# Altium PCB 集成运算放大器的应用.PcbDoc
Units mil, origin at the board's own origin, x right, y up, seen from the top; angles counter-clockwise.
Board outline 2220 x 1720 mil, 2 copper layers (Top Layer, Bottom Layer); 38 components, 25 nets, 93 pads, 102 vias.
Unrouted connection lines stored in the file: 4.
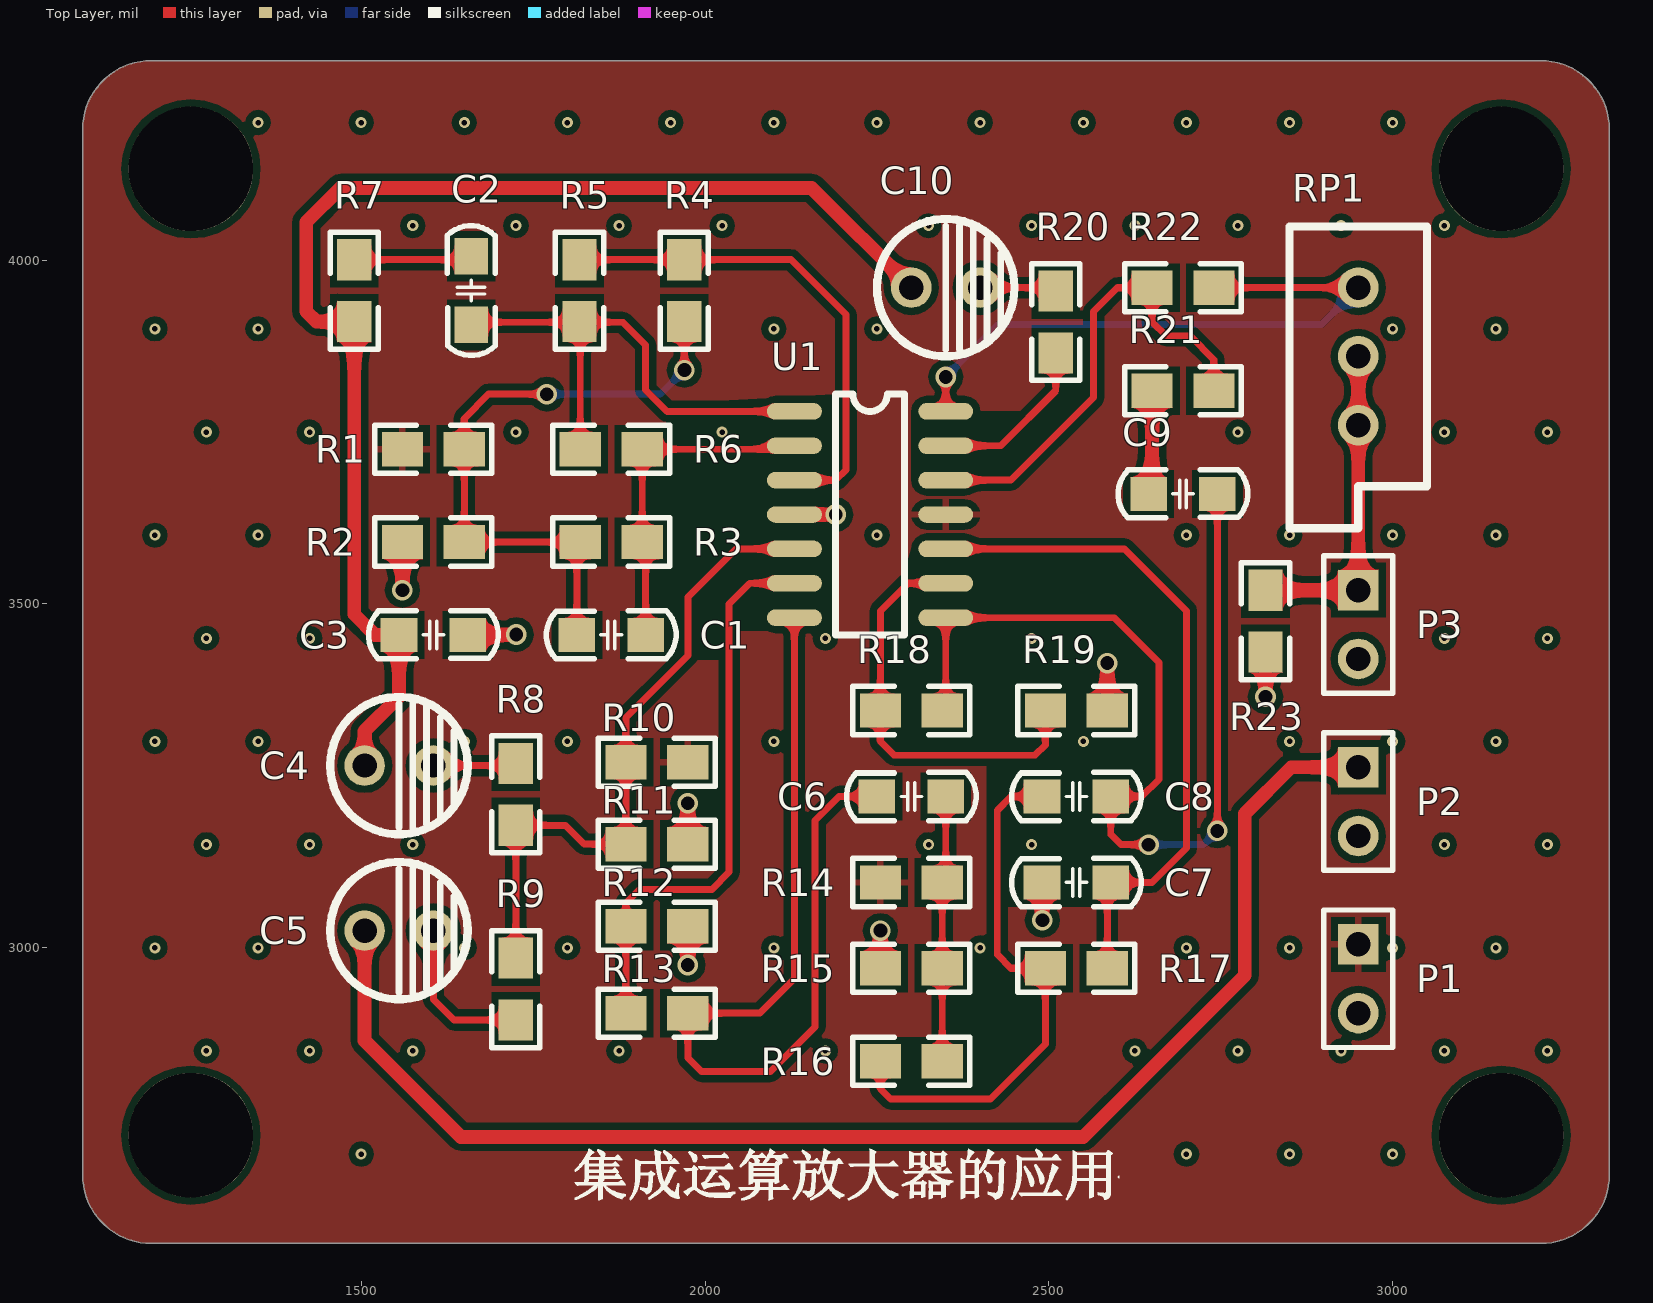
[diagram p0: Top Layer view]
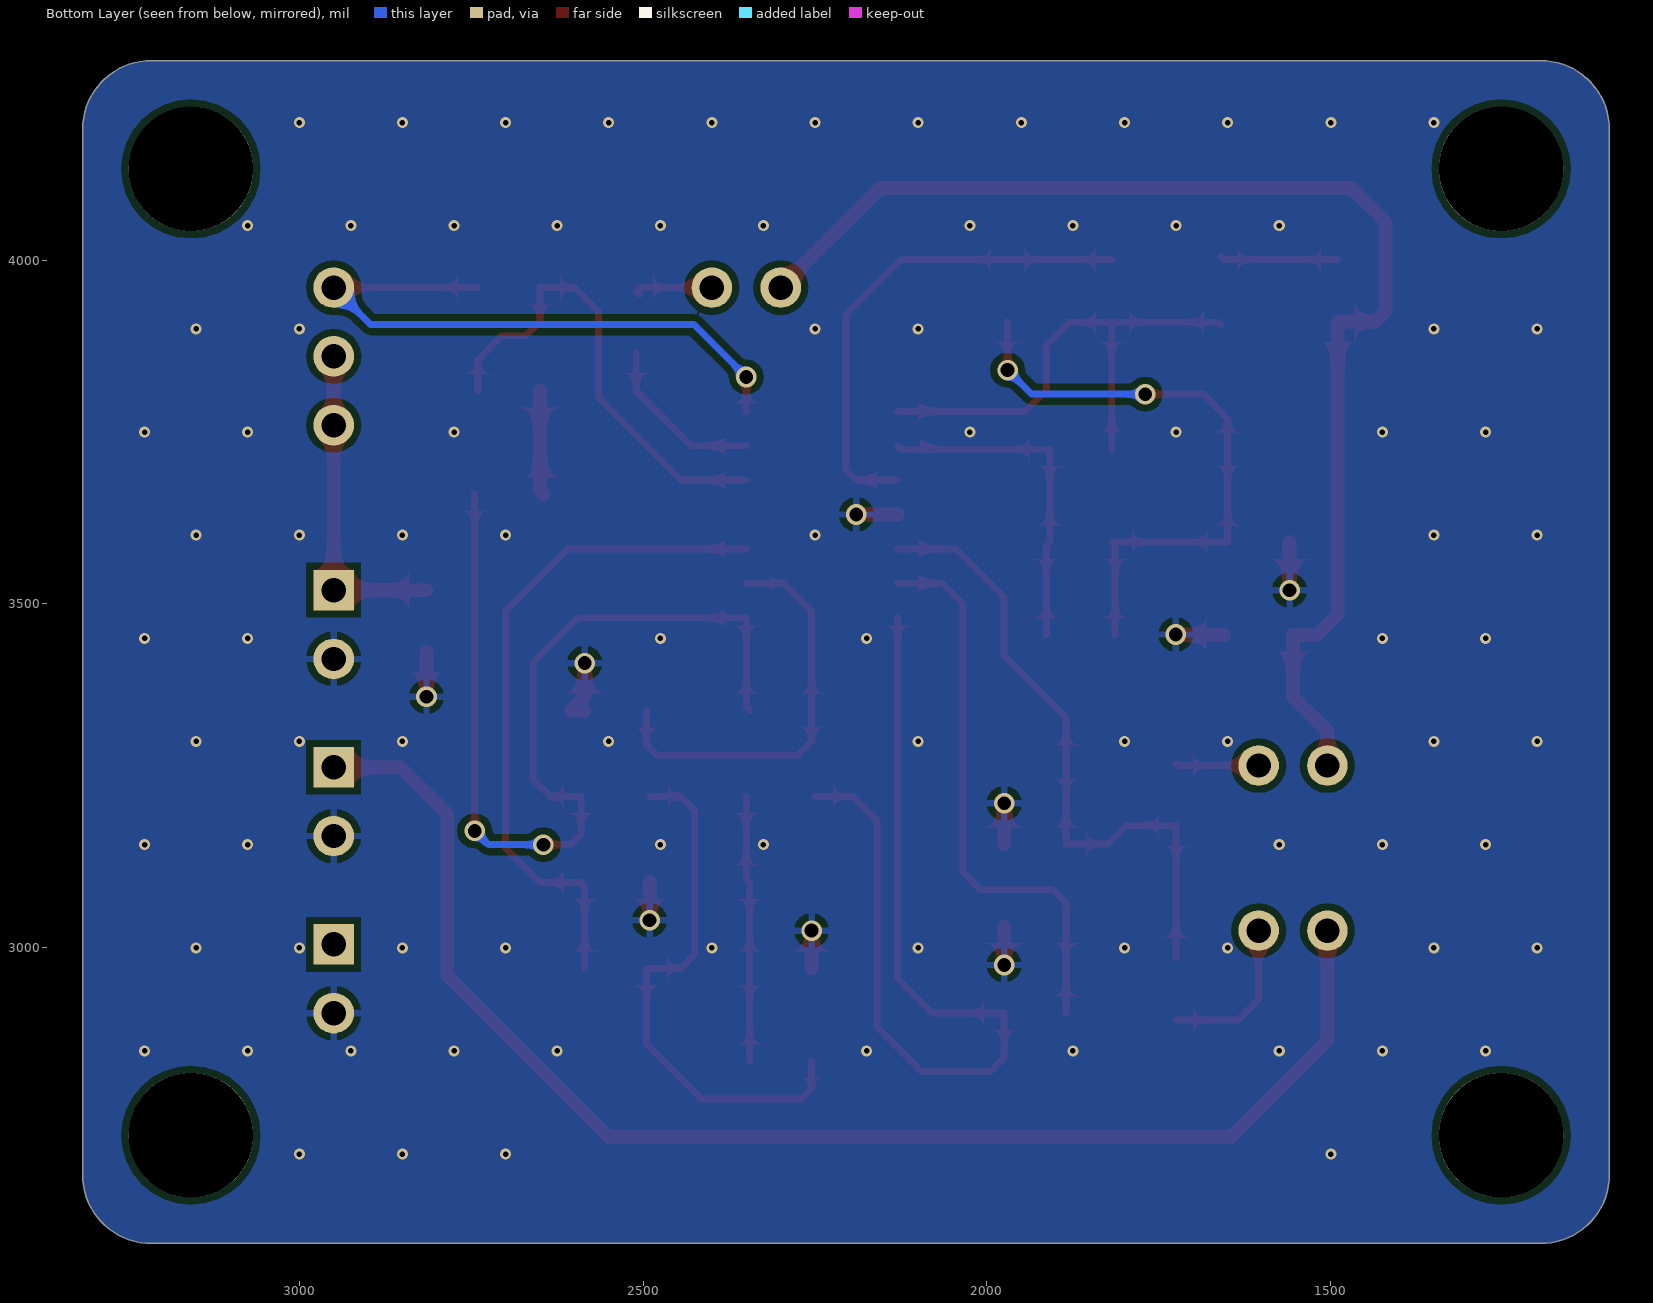
[diagram p1: Bottom Layer view, seen from below]
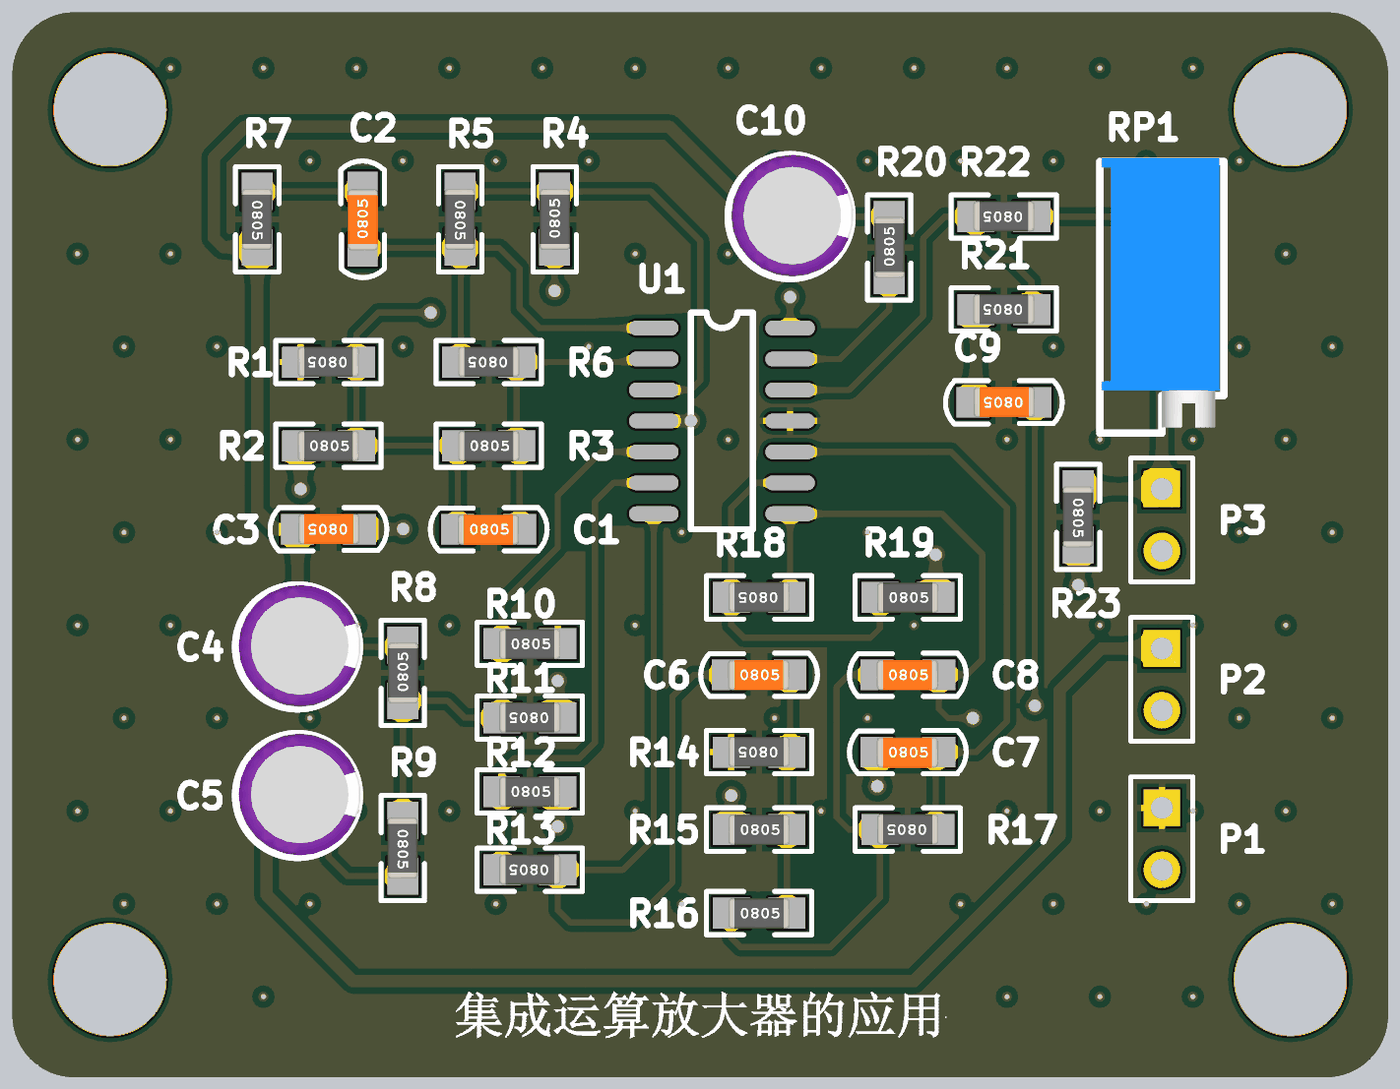
[diagram p2: 3D render of the assembled board from above, using the file's embedded part models]

## Layer stack, top to bottom
Top Solder: solder mask 0.4, Solder Resist, Dk 3.5
Top Layer: signal copper 1.4
Dielectric 1: dielectric 12.6, FR-4, Dk 4.8
Bottom Layer: signal copper 1.4
Bottom Solder: solder mask 0.4, Solder Resist, Dk 3.5

## Board outline
3215,4290 cw(c3215,4190) 3315,4190 3315,2670 cw(c3215,2670) 3215,2570 1195,2570 cw(c1195,2670) 1095,2670 1095,4190 cw(c1195,4190) 1195,4290

## Design rules (kind name [scope] priority, off if disabled: settings)
Clearance [All] p1: gap=10 ignorepadtopadclearanceinfootprint=FALSE except(0: Arc-Hole Track-Hole SMDPad-Hole THPad-Hole Via-Hole Fill-Hole Poly-Hole Region-Hole Text-Hole; 8: THPad-Via)
PolygonConnect [All] p1: connectstyle=Relief reliefconductorwidth=10 reliefentries=4 polygonreliefangle="90 Angle" airgapwidth=10
RoutingVias [All] p1: holewidth=12 width=24 viastyle="Through Hole" minholewidth=8 minwidth=16 maxholewidth=20 maxwidth=30
SolderMaskExpansion [All] p1: expansion=4
Width [InNetClass('Signal')] p1: maxlimit=10 minlimit=10 preferedwidth=10
Width Signal [InNetClass('Signal')] p2: maxlimit=10 minlimit=10 preferedwidth=10
Width PWR [InNetClass('PWR')] p3: maxlimit=20 minlimit=20 preferedwidth=20
30 further rules are at their usual default settings.

## Classes and differential pairs
net class Signal: NetC1_1 NetC1_2 NetC2_1 NetC2_2 NetC4_2 NetC5_2 NetC6_1 NetC6_2 NetC7_2 NetC8_1 NetC8_2 NetC10_2 NetR4_2 NetR8_1 NetR12_1 NetR18_2 NetR20_1 NetR21_1 NetR22_1
net class PWR: GND Ui1 Uo1 Uo2 Uo3 VCC

## Components (designator, comment, footprint, x,y, rotation, side; value= is the part's Value field where it differs from the comment)
C1 "160nF" 0805C 1813.65,3460 r0 top
C2 "100μF" 0805C 1655,3905.68 r90 top
C3 "100μF" 0805C 1655,3450 r180 top
C4 "10μF" CAP.1/.2 1555,3260 r0 top
C5 "10μF" CAP.1/.2 1555,3020 r0 top
C6 "100μF" 0805C 2250,3225 r0 top
C7 "0.1μF" 0805C 2490,3100 r0 top
C8 "0.1μF" 0805C 2490,3225 r0 top
C9 "100μF" 0805C 2745,3655 r180 top
C10 "100μF" CAP.1/.2 2350,3955 r0 top
P1 "POWER" HDR1X2 2950,3005 r270 top
P2 "Vin" HDR1X2 2950,3262.5 r270 top
P3 "Vin" HDR1X2 2950,3520 r270 top
R1 "10k" 0805R 1650,3725 r180 top
R2 "10k" 0805R 1560,3590 r0 top
R3 "100k" 0805R 1818.65,3590 r0 top
R4 "1.69k" 0805R 1970,3910.68 r90 top
R5 "2k" 0805R 1817.5,4000.68 r270 top
R6 "1k" 0805R 1908.65,3725 r180 top
R7 "3k" 0805R 1490,4000.68 r270 top
R8 "10k" 0805R 1725,3178 r90 top
R9 "1k" 0805R 1725,2985 r270 top
R10 "400k" 0805R 1885,3270 r0 top
R11 "25k" 0805R 1975,3150.67 r180 top
R12 "1k" 0805R 1885,3031.33 r0 top
R13 "10k" 0805R 1975,2905 r180 top
R14 "100k" 0805R 2345,3095 r180 top
R15 "20k" 0805R 2255,2970 r0 top
R16 "4.3k" 0805R 2255,2835 r0 top
R17 "4.3k" 0805R 2585,2970 r180 top
R18 "4.3k" 0805R 2345,3345 r180 top
R19 "1k" 0805R 2495,3345 r0 top
R20 "1k" 0805R 2510,3865 r90 top
R21 "1k" 0805R 2740,3810 r180 top
R22 "100k" 0805R 2740,3960 r180 top
R23 "1k" 0805R 2815,3520 r270 top
RP1 "10k" 3296 2950,3860 r270 top
U1 "LM324" SO-14 2130,3780 r0 top

## Footprints (in the part's own frame and the unit in brackets; to place one, negate y for a bottom-side part, rotate by r counter-clockwise, add the part's x,y. Pads: shape width x height; smd on the part's side, far side on the other; paste and mask are expansions set on the pad)
0805C [mm]
  rect 1.35x1.25 smd: 1(0,-0.127) 2(2.54,-0.127)
  silkscreen extent -1.12,-1.02 3.66,0.76, body extent 0,-0.76 2.51,0.48, height 0.79
0805R [mil]
  rect 60x50 smd: 1(0,0) 2(90,0)
  silkscreen extent -40,-35 130,35, body extent -4,-25 94,24, height 31
3296 [mm]
  round 1.5 hole 0.9: 1(-2.54,0) 2(2.54,0) 3(0,0)
  silkscreen extent -4.8,-2.54 6.35,2.54, body extent -4.93,-2.46 6.12,2.37, height 10.03
CAP.1/.2 [mm]
  round 1.5 hole 0.9: 1(-1.27,0.127) 2(1.27,0.127)
  silkscreen extent -2.54,-2.41 2.54,2.66, body extent -2.41,-2.33 2.59,2.67, height 11
HDR1X2 [mm] "Connector; Header; 2 Position"
  rect 1.5x1.5 hole 0.9: 1(0,0)
  round 1.5 hole 0.9: 2(2.54,0)
  silkscreen extent -1.27,-1.27 3.81,1.27
SO-14 [mil]
  oval 80x24 smd: 1(0,0) 2(0,-50) 3(0,-100) 4(0,-150) 5(0,-200) 6(0,-250) 7(0,-300) 8(220,-300) 9(220,-250) 10(220,-200) 11(220,-150) 12(220,-100) 13(220,-50) 14(220,0)
  silkscreen extent 60,-325 160,25

## Part data
C1 C2 C3 C6 C7 C8 C9: library part CAP, "Capacitor"
C4 C5 C10: library part CAP+, "Capacitor"
P1 P2 P3: library part "Header 2", "Header, 2-Pin", LatestRevisionDate=17-Jul-2002, LatestRevisionNote="Re-released for DXP Platform.", Publisher="Altium Limited"
R1 R2 R3 R4 R5 R6 R7 R8 R9 R10 R11 R12 R13 R14 R15 R16 R17 R18 R19 R20 R21 R22 R23: library part Res, "Resistor"
RP1: library part RPOT1, "Resistor"

## Free pads (board coordinates)
  round 181.1 hole 181.1: 2(1252.48,2727.48) 2(1252.48,4132.52) 2(3157.52,2727.48) 2(3157.52,4132.52)

## Via types
v1: diameter 16, hole 8, Top Layer to Bottom Layer, tented both sides, 88 vias
v2: diameter 30, hole 20, Top Layer to Bottom Layer, tented both sides, 14 vias

## Nets (pads, with @x,y where several pads share a name; then routed paths per layer and width w, separated by ;. In a path a pad name is that pad's centre, name@x,y a point inside that pad or via, vN(x,y) a via of type N, cw(c..) or ccw(c..) an arc to the next point about the centre after c; other vN are vias at no path point)
GND: C3.1 C7.1 P1.2 P2.2 P3.2 R2.1 R11.1 R12.2 R15.1 R19.2 R23.2 U1.4 | length 588.9
  Top Layer w20: v2(1560,3520) R2.1 ; C3.1 1725,3455 v2(1725.5,3455.5) ; v2(1975,2975) R12.2 ; R11.1 v2(1975,3210) ; U1.4 v2(2190,3630) ; R15.1 v2(2255,3025) ; C7.1 2490,3040.62 v2(2490.62,3040) ; R19.2 2605,3345 2585,3365 v2(2585,3414) ; v2(2815,3365) R23.2
  other v1: 1500,2700 2700,2700 2850,2700 3000,2700 1275,2850 1425,2850 1575,2850 1875,2850 2175,2850 2625,2850 2775,2850 2925,2850 3075,2850 3225,2850 1200,3000 1350,3000 1650,3000 1800,3000 2100,3000 2400,3000 2700,3000 2850,3000 3000,3000 3150,3000 1275,3150 1425,3150 1575,3150 2325,3150 2475,3150 3075,3150 3225,3150 1200,3300 1350,3300 1650,3300 1800,3300 2100,3300 2550,3300 2850,3300 3000,3300 3150,3300 1275,3450 1425,3450 2175,3450 2475,3450 3075,3450 3225,3450 1200,3600 1350,3600 2250,3600 2700,3600 2850,3600 3000,3600 3150,3600 1275,3750 1425,3750 1725,3750 2025,3750 2775,3750 3075,3750 3225,3750 1200,3900 1350,3900 2100,3900 2250,3900 3000,3900 3150,3900 1575,4050 1725,4050 1875,4050 2025,4050 2325,4050 2475,4050 2625,4050 2775,4050 2925,4050 3075,4050 1350,4200 1500,4200 1650,4200 1800,4200 1950,4200 2100,4200 2250,4200 2400,4200 2550,4200 2700,4200 2850,4200 3000,4200
NetC1_1: C1.1 R1.1 R2.2 R3.1 R4.1 | length 906.2
  Top Layer w10: v2(1770,3805) 1685,3805 1650,3770 R1.1 R2.2 R3.1 ccw(c1818.65,3585) 1813.65,3585 C1.1 ; v2(1970,3840) R4.1
  Bottom Layer w10: v2(1770,3805) 1935,3805 v2(1970,3840)
NetC1_2: C1.2 R3.2 R6.1 U1.2 | length 495.5
  Top Layer w10: C1.2 1913.65,3585 R3.2 R6.1 2125,3725 U1.2
NetC2_1: C2.1 R5.2 R6.2 U1.1 | length 749.5
  Top Layer w10: C2.1 1663.85,3909.53 R5.2@1818.65,3909.53 ; R5.2 R5.2@1818.65,3909.53 ; R6.2 R5.2@1818.65,3909.53 ; U1.1 1945,3780 1913.65,3811.35 1913.65,3876.35 1880.47,3909.53 R5.2@1818.65,3909.53
NetC2_2: C2.2 R7.1 | length 172.1
  Top Layer w10: R7.1 1655,4000.68 C2.2
NetC4_2: C4.2 R8.2 | length 121.2
  Top Layer w10: C4.2 1722,3265 R8.2
NetC5_2: C5.2 R9.2 | length 232.4
  Top Layer w10: C5.2 1605,2925 1635,2895 R9.2
NetC6_1: C6.1 R13.1 U1.7 | length 1390.4
  Top Layer w10: U1.7 2130,2955 2080,2905 R13.1 1975,2840 1995,2820 2095,2820 2160,2885 2160,3185 2195,3220 C6.1
NetC6_2: C6.2 R14.1 R15.2 R16.2 | length 387.1
  Top Layer w10: R16.2 R15.2 R14.1 2350,3100 C6.2
NetC7_2: C7.2 R17.1 U1.10 | length 990.1
  Top Layer w10: U1.10 2610,3580 2700,3490 2700,3145 2650,3095 C7.2 2585,3090 R17.1
NetC8_1: C8.1 R16.1 R17.2 | length 790.9
  Top Layer w10: R16.1 2255,2795 2270,2780 2415,2780 2495,2860 R17.2 2445,2970 2425,2990 2425,3200 2445,3220 C8.1
NetC8_2: C8.2 C9.1 R18.1 U1.8 | length 1438.8
  Top Layer w10: R18.1 2350,3350 U1.8 2595,3480 2660,3415 2660,3245 2635,3220 C8.2 2590,3165 2605,3150 v2(2645,3150) ; v2(2745,3170) C9.1
  Bottom Layer w10: v2(2645,3150) 2725,3150 v2(2745,3170)
NetC10_2: C10.2 R20.2 | length 119.1
  Top Layer w10: C10.2 2505,3960 R20.2 R20.2@2505,3950
NetR4_2: R4.2 R5.1 U1.3 | length 727.5
  Top Layer w10: R5.1 R4.2 2125,4000.68 2205,3920.68 2205,3695 2190,3680 U1.3
NetR8_1: R8.1 R9.1 R10.1 R11.2 U1.5 | length 944.9
  Top Layer w10: R9.1 R8.1 1797,3178 1824.33,3150.67 R11.2 R10.1 1885,3335 1975,3425 1975,3510 2045,3580 U1.5
NetR12_1: R12.1 R13.2 U1.6 | length 826.1
  Top Layer w10: R13.2 R12.1 1885,3065 1905,3085 2010,3085 2035,3110 2035,3500 2065,3530 U1.6
NetR18_2: R18.2 R19.1 U1.9 | length 606.1
  Top Layer w10: U1.9 2295,3530 2255,3490 R18.2 2255,3300 2275,3280 2480,3280 2495,3295 R19.1
NetR20_1: R20.1 U1.13 | length 248.1
  Top Layer w10: U1.13 2430,3730 2510,3810 R20.1
NetR21_1: R21.1 R22.2 U1.12 | length 697
  Top Layer w10: U1.12 2445,3680 2565,3800 2565,3925 2600,3960 R22.2 2650,3910 2670,3890 2705,3890 2740,3855 R21.1
NetR22_1: R22.1 RP1.1 U1.14 | length 913.8
  Top Layer w10: U1.14 v2(2350,3830) ; R22.1 RP1.1
  Bottom Layer w10: v2(2350,3830) 2426.3,3906.3 2896.3,3906.3 RP1.1
Ui1: C5.1 P2.1 | length 2023.3
  Top Layer w20: C5.1 1505,2865 1645,2725 2550,2725 2785,2960 2785,3195 2852.5,3262.5 P2.1
Uo1: C3.2 C4.1 C10.1 R7.2 | length 1880.1
  Top Layer w20: C4.1 1505,3315 1555,3365 C3.2 1520,3455 1490,3485 R7.2 1435,3910.68 1420,3925.68 1420,4055 1470,4105 2155,4105 C10.1
Uo2: C9.2 R21.2 | length 152.1
  Top Layer w20: C9.2 2650,3665 R21.2
Uo3: P3.1 R23.1 RP1.2 RP1.3 | length 475
  Top Layer w20: R23.1 P3.1 RP1.2 RP1.3
VCC: P1.1 R1.2 R10.2 R14.2 U1.11

## Polygon pours and split planes (outlines as drawn)
VCC on Top Layer "Top Layer-VCC" (solid, remove dead copper, pour order 20): 3215,4290 cw(c3215,4190) 3315,4190 3315,2670 cw(c3215,2670) 3215,2570 1195,2570 cw(c1195,2670) 1095,2670 1095,4190 cw(c1195,4190) 1195,4290
no net on Top Layer "Top Layer-No Net" (solid, remove dead copper, pour order 8): 1315,4290
GND on Bottom Layer "Bottom Layer-GND" (solid, remove dead copper, pour order 18): 3215,4290 cw(c3215,4190) 3315,4190 3315,2670 cw(c3215,2670) 3215,2570 1195,2570 cw(c1195,2670) 1095,2670 1095,4190 cw(c1195,4190) 1195,4290

## Other copper
Top Layer:
  pour cut-out: 2637,3534.84
  pour cut-out: 2035,3790.87
  pour cut-out: 2339.87,3780.81

## Silkscreen, mask and mechanical layers (free items; w line width, h text height)
Top Overlay:
  drawing of 2788 lines, arcs and shapes, not listed

## Dimensions
1195,4290 to 1195,2570 on Mechanical 1
1095,4190 to 3315,4190 on Mechanical 1